# Altium PCB OK6010_DB.PcbDoc (part 3 of 4)
Units mil, origin at the board's own origin, x right, y up, seen from the top; angles counter-clockwise.
Board outline 4000 x 5500 mil, 4 copper layers (Top Layer, Ground Plane, Power Plane, Bottom Layer), stack 34.2 mil thick; 268 components, 248 nets, 1028 pads, 599 vias.
Unrouted connection lines stored in the file: 10.
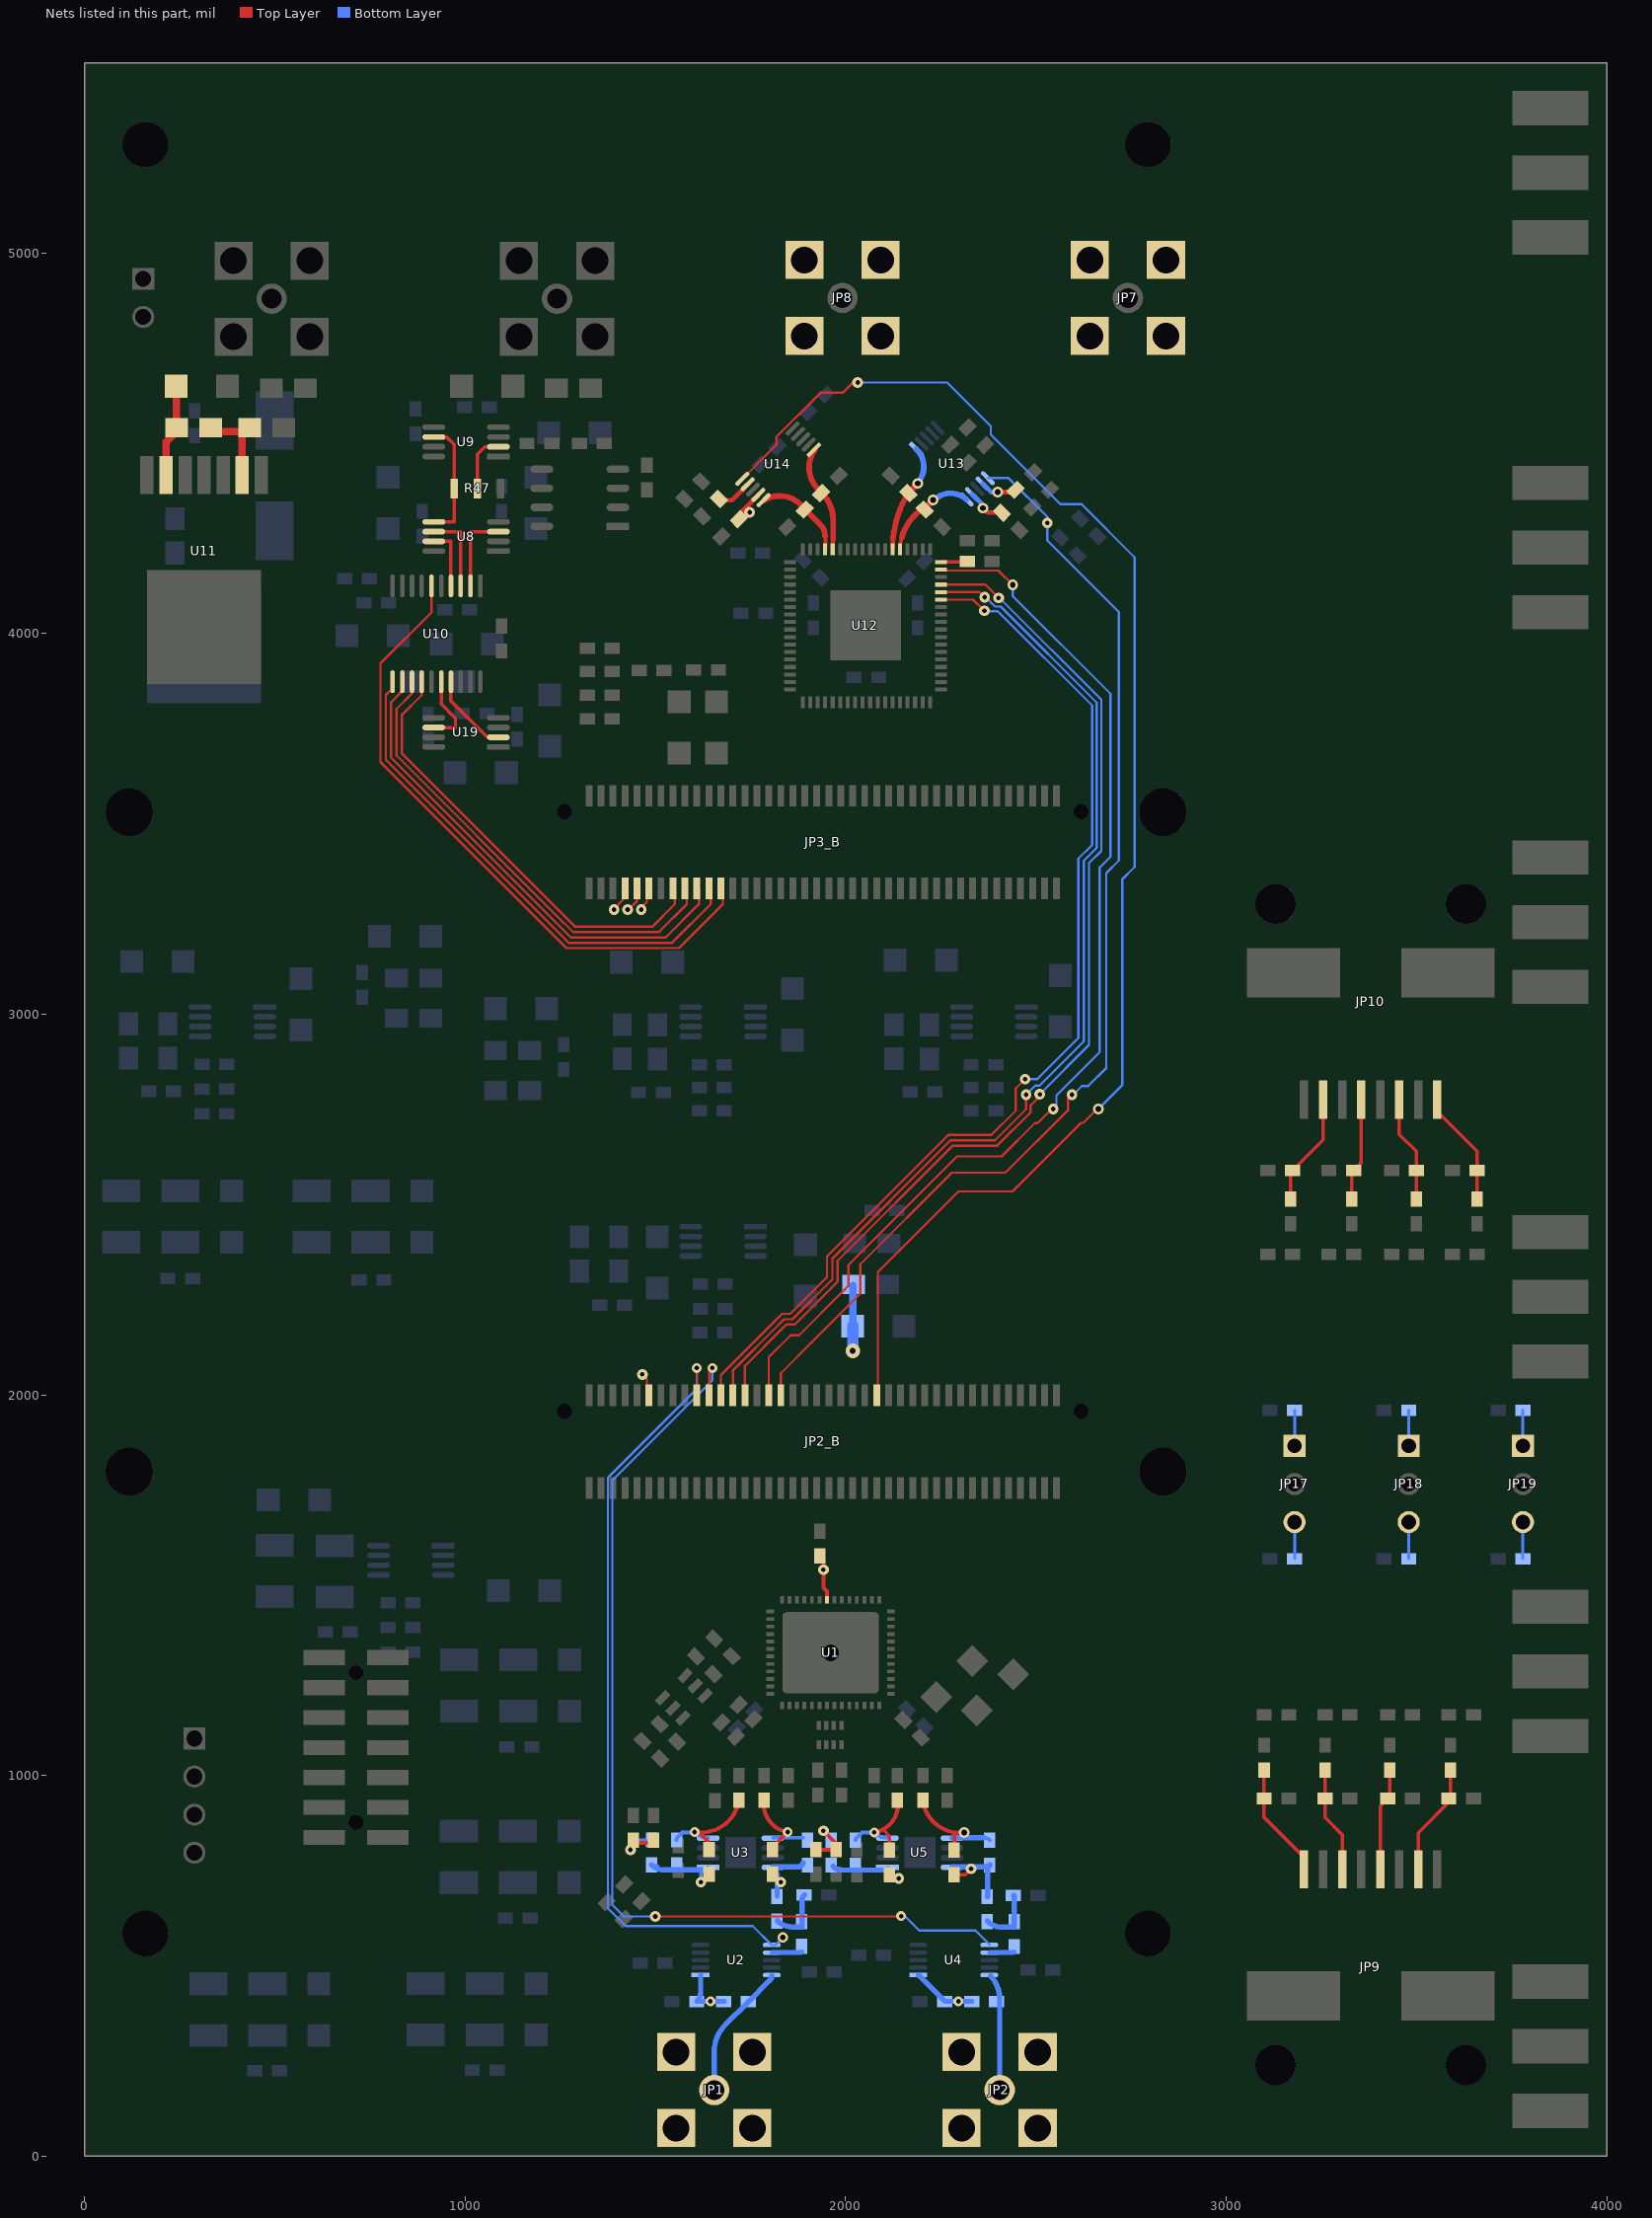
[diagram p5: the nets of this part, all layers, seen from the top]

## Via types
v1: diameter 28, hole 12, Top Layer to Bottom Layer, 291 vias
v2: diameter 28, hole 15, Top Layer to Bottom Layer, 214 vias
v3: diameter 26, hole 12, Top Layer to Bottom Layer, 64 vias
v4: diameter 38, hole 15, Top Layer to Bottom Layer, 26 vias
v5: diameter 35, hole 15, Top Layer to Bottom Layer, 2 vias
v6: diameter 26, hole 12, Top Layer to Bottom Layer, tented both sides, 1 vias
v7: diameter 58, hole 44, Top Layer to Bottom Layer, 1 vias

## Nets (pads, with @x,y where several pads share a name; then routed paths per layer and width w, separated by ;. In a path a pad name is that pad's centre, name@x,y a point inside that pad or via, vN(x,y) a via of type N, cw(c..) or ccw(c..) an arc to the next point about the centre after c; other vN are vias at no path point) (continued)
NetC107_1: C107.1 R1.1 R3.2 U3.8 | length 515.2
  Bottom Layer w14: R3.2@1820.47,683.87 1820.47,732.96 ; U3.8@1809.29,759.96 cw(c1782.29,732.96) 1820.47,732.96 ; U3.8@1809.29,759.96 cw(c1782.29,732.96) 1820.47,732.96 ; U3.8@1809.29,759.96 cw(c1782.29,732.96) 1820.47,732.96 ; U3.8@1809.29,759.96 cw(c1782.29,732.96) 1820.47,732.96 ; U3.8@1809.29,759.96 cw(c1782.29,732.96) 1820.47,732.96 ; U3.8@1809.29,759.96 cw(c1782.29,732.96) 1820.47,732.96 ; U3.8@1809.29,759.96 cw(c1782.29,732.96) 1820.47,732.96 ; U3.8@1809.29,759.96 cw(c1782.29,732.96) 1820.47,732.96 ; U3.8@1809.29,759.96 1872.28,759.96 ; 1872.28,759.96 ccw(c1872.28,777.95) R1.1@1888.58,770.34 ; 1872.28,759.96 ccw(c1872.28,777.95) R1.1@1888.58,770.34 ; 1872.28,759.96 ccw(c1872.28,777.95) R1.1@1888.58,770.34 ; 1872.28,759.96 ccw(c1872.28,777.95) R1.1@1888.58,770.34 ; 1872.28,759.96 ccw(c1872.28,777.95) R1.1@1888.58,770.34 ; 1872.28,759.96 ccw(c1872.28,777.95) R1.1@1888.58,770.34 ; 1872.28,759.96 ccw(c1872.28,777.95) R1.1@1888.58,770.34 ; 1872.28,759.96 ccw(c1872.28,777.95) R1.1@1888.58,770.34
  other v1: 1830,720
NetC107_2: C107.2 R1.2 R4.1 U3.5 | length 257.6
  Top Layer w10: C107.2@1808.49,805.49 1808.49,812.25 v3(1848,851.76)
  Top Layer w10.63: R4.1@1786.2,935.75 ccw(c1859.09,924.65) v3(1848,851.76)
  Bottom Layer w10: U3.5@1809.29,836.76 R1.2@1888.47,836.76
NetC108_1: C108.1 R7.2 R10.1 U3.1 | length 547.8
  Bottom Layer w9: v1(1620,720) 1620,744.18
  Bottom Layer w14: R7.2@1490,766 ccw(c1504.58,780.58) R7.2@1495.74,761.95 ; R7.2@1490,766 ccw(c1504.58,780.58) R7.2@1495.74,761.95 ; R7.2@1490,766 ccw(c1504.58,780.58) R7.2@1495.74,761.95 ; R7.2@1490,766 ccw(c1504.58,780.58) R7.2@1495.74,761.95 ; R7.2@1490,766 ccw(c1504.58,780.58) R7.2@1495.74,761.95 ; R7.2@1490,766 ccw(c1504.58,780.58) R7.2@1495.74,761.95 ; R7.2@1490,766 ccw(c1504.58,780.58) R7.2@1495.74,761.95 ; R7.2@1490,766 ccw(c1504.58,780.58) R7.2@1495.74,761.95 ; R7.2@1495.46,762.23 ccw(c1517.74,784.51) R7.2@1495.74,761.95 ; R7.2@1495.46,762.23 ccw(c1517.74,784.51) R7.2@1495.74,761.95 ; R7.2@1495.46,762.23 ccw(c1517.74,784.51) R7.2@1495.74,761.95 ; R7.2@1495.46,762.23 ccw(c1517.74,784.51) R7.2@1495.74,761.95 ; R7.2@1495.46,762.23 ccw(c1517.74,784.51) R7.2@1495.74,761.95 ; R7.2@1495.46,762.23 ccw(c1517.74,784.51) R7.2@1495.74,761.95 ; R7.2@1495.46,762.23 ccw(c1517.74,784.51) R7.2@1495.74,761.95 ; R7.2@1495.46,762.23 ccw(c1517.74,784.51) R7.2@1495.74,761.95 ; R7.2@1495.74,761.95 ccw(c1504.58,780.58) R7.2@1504.58,759.96 ; R7.2@1495.74,761.95 ccw(c1517.74,784.51) 1517.74,753 ; R7.2@1495.74,761.95 ccw(c1517.74,784.51) 1517.74,753 ; R7.2@1495.74,761.95 ccw(c1504.58,780.58) R7.2@1504.58,759.96 ; R7.2@1495.74,761.95 ccw(c1504.58,780.58) R7.2@1504.58,759.96 ; R7.2@1495.74,761.95 ccw(c1504.58,780.58) R7.2@1504.58,759.96 ; R7.2@1495.74,761.95 ccw(c1517.74,784.51) 1517.74,753 ; R7.2@1495.74,761.95 ccw(c1517.74,784.51) 1517.74,753 ; R7.2@1495.74,761.95 ccw(c1517.74,784.51) 1517.74,753 ; R7.2@1495.74,761.95 ccw(c1517.74,784.51) 1517.74,753 ; R7.2@1495.74,761.95 ccw(c1517.74,784.51) 1517.74,753 ; R7.2@1495.74,761.95 ccw(c1517.74,784.51) 1517.74,753 ; R7.2@1495.74,761.95 ccw(c1504.58,780.58) R7.2@1504.58,759.96 ; R7.2@1495.74,761.95 ccw(c1504.58,780.58) R7.2@1504.58,759.96 ; R7.2@1495.74,761.95 ccw(c1504.58,780.58) R7.2@1504.58,759.96 ; R7.2@1495.74,761.95 ccw(c1504.58,780.58) R7.2@1504.58,759.96 ; 1517.74,753 U3.1@1628.82,753 ; U3.1@1628.82,753 ccw(c1628.82,766.52) U3.1@1638.38,756.96 ; U3.1@1628.82,753 ccw(c1628.82,766.52) U3.1@1638.38,756.96 ; U3.1@1628.82,753 ccw(c1628.82,766.52) U3.1@1638.38,756.96 ; U3.1@1628.82,753 ccw(c1628.82,766.52) U3.1@1638.38,756.96 ; U3.1@1628.82,753 ccw(c1628.82,766.52) U3.1@1638.38,756.96 ; U3.1@1628.82,753 ccw(c1628.82,766.52) U3.1@1638.38,756.96 ; U3.1@1628.82,753 ccw(c1628.82,766.52) U3.1@1638.38,756.96 ; U3.1@1628.82,753 ccw(c1628.82,766.52) U3.1@1638.38,756.96
NetC108_2: C108.2 R8.1 R10.2 U3.4 | length 576.6
  Top Layer w10: v3@1615.03,850.56 1641.49,824.09 C108.2@1641.49,805.49
  Top Layer w10.63: v3(1603.58,851.76) ccw(c1619.91,952.08) 1615.03,850.56 ccw(c1619.91,952.08) R8.1@1720.24,935.75
  Bottom Layer w10: R10.2@1556,831 cw(c1564.57,831) 1558.5,837.05 1572.98,851.53 ; 1572.24,850.76 v3@1604.24,850.76 ; U3.4@1639.38,836.76 U3.4@1638.04,836.76 ; v3@1604.24,850.76 ccw(c1638.04,884.56) U3.4@1638.04,836.76 ; v3@1604.24,850.76 ccw(c1638.04,884.56) U3.4@1638.04,836.76 ; v3@1604.24,850.76 ccw(c1638.04,884.56) U3.4@1638.04,836.76 ; v3@1604.24,850.76 ccw(c1638.04,884.56) U3.4@1638.04,836.76 ; v3@1604.24,850.76 ccw(c1638.04,884.56) U3.4@1638.04,836.76 ; v3@1604.24,850.76 ccw(c1638.04,884.56) U3.4@1638.04,836.76 ; v3@1604.24,850.76 ccw(c1638.04,884.56) U3.4@1638.04,836.76 ; v3@1604.24,850.76 ccw(c1638.04,884.56) U3.4@1638.04,836.76
NetC109_1: C109.1 R11.1 R13.2 U5.8 | length 350.3
  Top Layer w9: C109.1@2285.49,739.9 2314.9,739.9 v1(2330,755)
  Bottom Layer w14: U5.8@2280.38,759.96 R11.1@2365,759.96 ; R13.2@2372.85,682.83 R11.1@2372.85,760.91 ; R11.1@2372.85,762.82 R11.1@2372.85,760.91 ; R11.1@2367.08,759.96 ccw(c2367.08,778.03) R11.1@2372.85,760.91 ; R11.1@2367.08,759.96 ccw(c2367.08,778.03) R11.1@2372.85,760.91 ; R11.1@2367.08,759.96 ccw(c2367.08,778.03) R11.1@2372.85,760.91 ; R11.1@2367.08,759.96 ccw(c2367.08,778.03) R11.1@2372.85,760.91 ; R11.1@2367.08,759.96 ccw(c2367.08,778.03) R11.1@2372.85,760.91 ; R11.1@2367.08,759.96 ccw(c2367.08,778.03) R11.1@2372.85,760.91 ; R11.1@2367.08,759.96 ccw(c2367.08,778.03) R11.1@2372.85,760.91 ; R11.1@2367.08,759.96 ccw(c2367.08,778.03) R11.1@2372.85,760.91 ; R11.1@2372.85,760.91 ccw(c2367.08,778.03) R11.1@2379.84,765.24 ; R11.1@2372.85,760.91 ccw(c2367.08,778.03) R11.1@2379.84,765.24 ; R11.1@2372.85,760.91 ccw(c2367.08,778.03) R11.1@2379.84,765.24 ; R11.1@2372.85,760.91 ccw(c2367.08,778.03) R11.1@2379.84,765.24 ; R11.1@2372.85,760.91 ccw(c2367.08,778.03) R11.1@2379.84,765.24 ; R11.1@2372.85,760.91 ccw(c2367.08,778.03) R11.1@2379.84,765.24 ; R11.1@2372.85,760.91 ccw(c2367.08,778.03) R11.1@2379.84,765.24 ; R11.1@2372.85,760.91 ccw(c2367.08,778.03) R11.1@2379.84,765.24 ; R11.1@2378.85,762.82 cw(c2382.29,762.82) R11.1@2379.84,765.23 ; R11.1@2378.85,762.82 cw(c2382.29,762.82) R11.1@2379.84,765.23 ; R11.1@2378.85,762.82 cw(c2382.29,762.82) R11.1@2379.84,765.23 ; R11.1@2378.85,762.82 cw(c2382.29,762.82) R11.1@2379.84,765.23 ; R11.1@2378.85,762.82 cw(c2382.29,762.82) R11.1@2379.84,765.23 ; R11.1@2378.85,762.82 cw(c2382.29,762.82) R11.1@2379.84,765.23 ; R11.1@2378.85,762.82 cw(c2382.29,762.82) R11.1@2379.84,765.23 ; R11.1@2378.85,762.82 cw(c2382.29,762.82) R11.1@2379.84,765.23
NetC109_2: C109.2 R11.2 R14.1 U5.5 | length 295.4
  Top Layer w10.63: R14.1@2203,935.75 ccw(c2299.75,947.51) 2290.05,850.53 ccw(c2299.75,947.51) v2(2311.52,850.76) ; C109.2@2285.49,804.9 2285.49,845.97
  Bottom Layer w10: R11.2@2364.15,836.76 cw(c2364.15,814.54) R11.2@2379.86,830.25
  Bottom Layer w14: U5.5@2280.38,836.76 R11.2@2364.15,836.76
NetC110_1: C110.1 R17.2 R20.1 U5.1 | length 434.4
  Bottom Layer w9: U5.1@2110.38,755.96 2136.34,730 v1(2140,730)
  Bottom Layer w14: R17.2@1967.46,761.23 ccw(c1989.74,783.51) 1989.74,752 ; R17.2@1967.46,761.23 ccw(c1989.74,783.51) 1989.74,752 ; R17.2@1967.46,761.23 ccw(c1989.74,783.51) 1989.74,752 ; R17.2@1967.46,761.23 ccw(c1989.74,783.51) 1989.74,752 ; R17.2@1967.46,761.23 ccw(c1989.74,783.51) 1989.74,752 ; R17.2@1967.46,761.23 ccw(c1989.74,783.51) 1989.74,752 ; R17.2@1967.46,761.23 ccw(c1989.74,783.51) 1989.74,752 ; R17.2@1967.46,761.23 ccw(c1989.74,783.51) 1989.74,752 ; 1989.74,752 U5.1@2100.82,752 ; U5.1@2100.82,752 ccw(c2100.82,765.52) U5.1@2110.38,755.96 ; U5.1@2100.82,752 ccw(c2100.82,765.52) U5.1@2110.38,755.96 ; U5.1@2100.82,752 ccw(c2100.82,765.52) U5.1@2110.38,755.96 ; U5.1@2100.82,752 ccw(c2100.82,765.52) U5.1@2110.38,755.96 ; U5.1@2100.82,752 ccw(c2100.82,765.52) U5.1@2110.38,755.96 ; U5.1@2100.82,752 ccw(c2100.82,765.52) U5.1@2110.38,755.96 ; U5.1@2100.82,752 ccw(c2100.82,765.52) U5.1@2110.38,755.96 ; U5.1@2100.82,752 ccw(c2100.82,765.52) U5.1@2110.38,755.96
NetC110_2: C110.2 R18.1 R20.2 U5.4 | length 538.2
  Top Layer w9: 2098.2,858.41 2115.49,841.12 C110.2@2115.49,804.9
  Top Layer w10.63: v3(2075.24,850.76) ccw(c2063.58,924.09) 2098.2,858.41 ccw(c2063.58,924.09) R18.1@2136.91,935.75
  Bottom Layer w10: R20.2@2026.26,830.23 cw(c2034.83,830.23) 2028.76,836.28 2043.24,850.76 v3(2075.24,850.76) ; U5.4@2110.38,836.76 U5.4@2109.04,836.76 ; v3(2075.24,850.76) ccw(c2109.04,884.56) U5.4@2109.04,836.76 ; v3(2075.24,850.76) ccw(c2109.04,884.56) U5.4@2109.04,836.76 ; v3(2075.24,850.76) ccw(c2109.04,884.56) U5.4@2109.04,836.76 ; v3(2075.24,850.76) ccw(c2109.04,884.56) U5.4@2109.04,836.76 ; v3(2075.24,850.76) ccw(c2109.04,884.56) U5.4@2109.04,836.76 ; v3(2075.24,850.76) ccw(c2109.04,884.56) U5.4@2109.04,836.76 ; v3(2075.24,850.76) ccw(c2109.04,884.56) U5.4@2109.04,836.76 ; v3(2075.24,850.76) ccw(c2109.04,884.56) U5.4@2109.04,836.76
NetC112_2: C112.2 JP9.2 R62.2 | length 300.4
  Top Layer w9: JP9.2@3505,754 3505,850 3595,940 3590,945 R62.2@3590,1015
NetC114_2: C114.2 JP9.4 R63.2 | length 271.4
  Top Layer w9: JP9.4@3405,754 3405,920 C114.2@3425,940 3430,945 R63.2@3430,1015
NetC116_1: C116.1 JP9.6 R64.2 | length 279.6
  Top Layer w9: R64.2@3260,1015 C116.1@3260,940 3260,890 3305,845 JP9.6@3305,754
NetC118_1: C118.1 JP9.8 R65.2 | length 304.5
  Top Layer w9: R65.2@3100,1015 C118.1@3100,940 3100,890 3205,785 JP9.8@3205,754
NetC120_2: C120.2 JP10.2 R66.2 | length 296.2
  Top Layer w9: R66.2@3170,2515 3170,2585 C120.2@3175,2590 3255,2670 JP10.2@3255,2776
NetC122_2: C122.2 JP10.4 R67.2 | length 271.4
  Top Layer w9: R67.2@3330,2515 3330,2585 C122.2@3335,2590 3355,2610 JP10.4@3355,2776
NetC124_1: C124.1 JP10.6 R68.2 | length 279.6
  Top Layer w9: JP10.6@3455,2776 3455,2685 3500,2640 C124.1@3500,2590 R68.2@3500,2515
NetC126_1: C126.1 JP10.8 R69.2 | length 304.5
  Top Layer w9: JP10.8@3555,2776 3555,2745 3660,2640 C126.1@3660,2590 R69.2@3660,2515
NetJP1_0: JP1.0 R5.1 R9.2 U2.1 | length 330.9
  Bottom Layer w14: U2.1@1619.33,476 1619.33,431.09 ; R5.1@1680.71,406.95 R9.2@1609.33,406.95 ; R9.2@1609.33,406.94 ccw(c1585.18,431.09) 1619.33,431.09 ; R9.2@1609.33,406.95 ccw(c1585.18,431.09) 1619.33,431.09 ; R9.2@1609.33,406.95 ccw(c1585.18,431.09) 1619.33,431.09 ; R9.2@1609.33,406.95 ccw(c1585.18,431.09) 1619.33,431.09 ; R9.2@1609.33,406.95 ccw(c1585.18,431.09) 1619.33,431.09 ; R9.2@1609.33,406.95 ccw(c1585.18,431.09) 1619.33,431.09 ; R9.2@1609.33,406.95 ccw(c1585.18,431.09) 1619.33,431.09 ; R9.2@1609.33,406.95 ccw(c1585.18,431.09) 1619.33,431.09
  other v3: 1645.02,406.95
NetJP1_1: JP1.1 R5.2 U2.10 | length 350.9
  Bottom Layer w14: JP1.1@1655,181 1655,274.82 cw(c1755,274.82) 1684.29,345.53 1744.88,406.12 1800.16,461.4 ccw(c1785.24,476.32) U2.10@1806.26,474.48
NetJP2_0: JP2.0 R15.1 R19.2 U4.1 | length 169
  Bottom Layer w14: U4.1@2191.93,476.28 2261.26,406.95 R15.1@2332.2,406.95
  other v3: 2296.73,406.95
NetJP2_1: JP2.1 R15.2 U4.10 | length 299.2
  Bottom Layer w14: U4.10@2381.09,474.08 cw(c2316.01,413.39) 2405,413.39 JP2.1@2405,181
NetJP7_0: JP7.0 R35.2 U13.9 | length 103.7
  Top Layer w12: v2@2359,4332 2373.04,4317.96 R35.2@2411.04,4317.96
  Bottom Layer w12: U13.9@2332.15,4366.69 2359,4339.84 v2@2359,4332
  other v2: 2361,4330
NetJP8_0: JP8.0 R39.2 U14.9 | length 88.3
  Top Layer w12: R39.2@1719.96,4313.8 1735,4328.84 ; v1(1748,4319) 1735,4328.84 ; U14.9@1770.85,4364.69 1735,4328.84
NetJP17_1: JP17.1 R58.1 | length 94
  Bottom Layer w8: JP17.1@3180,1866 R58.1@3180,1960
NetJP17_3: JP17.3 R59.1 | length 96
  Bottom Layer w8: R59.1@3180,1570 JP17.3@3180,1666
NetJP18_1: JP18.1 R60.1 | length 94
  Bottom Layer w8: JP18.1@3480,1866 R60.1@3480,1960
NetJP18_3: JP18.3 R61.1 | length 96
  Bottom Layer w8: R61.1@3480,1570 JP18.3@3480,1666
NetJP19_1: JP19.1 R70.1 | length 94
  Bottom Layer w8: JP19.1@3780,1866 R70.1@3780,1960
NetJP19_3: JP19.3 R71.1 | length 96
  Bottom Layer w8: R71.1@3780,1570 JP19.3@3780,1666
NetR2_1: R2.1 U2.7 | length 121.7
  Bottom Layer w12: U2.7@1806.34,535.37 R2.1@1880.52,535.37 ; R2.1@1880.52,535.37 ccw(c1880.52,542.93) R2.1@1885.87,537.58 ; R2.1@1880.52,535.37 ccw(c1880.52,542.93) R2.1@1885.87,537.58 ; R2.1@1880.52,535.37 ccw(c1880.52,542.93) R2.1@1885.87,537.58 ; R2.1@1880.52,535.37 ccw(c1880.52,542.93) R2.1@1885.87,537.58 ; R2.1@1880.52,535.37 ccw(c1880.52,542.93) R2.1@1885.87,537.58 ; R2.1@1880.52,535.37 ccw(c1880.52,542.93) R2.1@1885.87,537.58 ; R2.1@1880.52,535.37 ccw(c1880.52,542.93) R2.1@1885.87,537.58 ; R2.1@1880.52,535.37 ccw(c1880.52,542.93) R2.1@1885.87,537.58
NetR2_2: R2.2 R3.1 R6.2 | length 154.9
  Bottom Layer w14: R3.1@1820.47,618.87 ccw(c1859.8,658.2) 1859.8,602.58 1885.87,602.58 1885.87,671.72 cw(c1906.24,671.72) R6.2@1891.83,686.13
NetR7_1: R7.1 R54.2 R55.2 | length 99.7
  Top Layer w10: R54.2@1449.8,823.61 1489,823.61 R55.2@1495.9,830.51
  Bottom Layer w9: v1(1435,805) 1461,831 R7.1@1475,831
NetR12_1: R12.1 U4.7 | length 94.7
  Bottom Layer w12: U4.7@2378.93,535.37 R12.1@2439.48,535.37 ; R12.1@2439.48,535.37 ccw(c2439.48,540.8) R12.1@2443.32,536.96 ; R12.1@2439.48,535.37 ccw(c2439.48,540.8) R12.1@2443.32,536.96 ; R12.1@2439.48,535.37 ccw(c2439.48,540.8) R12.1@2443.32,536.96 ; R12.1@2439.48,535.37 ccw(c2439.48,540.8) R12.1@2443.32,536.96 ; R12.1@2439.48,535.37 ccw(c2439.48,540.8) R12.1@2443.32,536.96 ; R12.1@2439.48,535.37 ccw(c2439.48,540.8) R12.1@2443.32,536.96 ; R12.1@2439.48,535.37 ccw(c2439.48,540.8) R12.1@2443.32,536.96 ; R12.1@2439.48,535.37 ccw(c2439.48,540.8) R12.1@2443.32,536.96
NetR12_2: R12.2 R13.1 R16.2 | length 484.9
  Bottom Layer w14: R13.1@2372.85,617.83 ccw(c2411.17,656.15) 2411.17,601.96 ; R13.1@2372.85,617.83 ccw(c2411.17,656.15) 2411.17,601.96 ; R13.1@2372.85,617.83 ccw(c2411.17,656.15) 2411.17,601.96 ; R13.1@2372.85,617.83 ccw(c2411.17,656.15) 2411.17,601.96 ; R13.1@2372.85,617.83 ccw(c2411.17,656.15) 2411.17,601.96 ; R13.1@2372.85,617.83 ccw(c2411.17,656.15) 2411.17,601.96 ; R13.1@2372.85,617.83 ccw(c2411.17,656.15) 2411.17,601.96 ; R13.1@2372.85,617.83 ccw(c2411.17,656.15) 2411.17,601.96 ; 2411.17,601.96 2443.32,601.96 R16.2@2443.32,682.21 ; R16.2@2441.83,685.8 cw(c2438.24,682.21) R16.2@2443.32,682.21 ; R16.2@2441.83,685.8 cw(c2438.24,682.21) R16.2@2443.32,682.21 ; R16.2@2441.83,685.8 cw(c2438.24,682.21) R16.2@2443.32,682.21 ; R16.2@2441.83,685.8 cw(c2438.24,682.21) R16.2@2443.32,682.21 ; R16.2@2441.83,685.8 cw(c2438.24,682.21) R16.2@2443.32,682.21 ; R16.2@2441.83,685.8 cw(c2438.24,682.21) R16.2@2443.32,682.21 ; R16.2@2441.83,685.8 cw(c2438.24,682.21) R16.2@2443.32,682.21 ; R16.2@2441.83,685.8 cw(c2438.24,682.21) R16.2@2443.32,682.21
NetR17_1: R17.1 R56.2 R57.2 | length 116.2
  Top Layer w10: R56.2@1922.1,805.49 R57.2@1975.1,805.49 1975.1,821.9 v1(1942,855)
NetR24_1: R24.1 R25.2 U11.2 | length 196.4
  Top Layer w20: R24.1@332,4531 414.51,4531 U11.2@414.51,4417.1
NetR24_2: R24.2 R26.1 U11.6 | length 234.3
  Top Layer w20: U11.6@214.51,4417.1 214.51,4503.51 242,4531 R26.1@242,4640
NetR31_2: R31.2 U12.54 | length 65.8
  Top Layer w9: U12.54@2251.06,4188.87 R31.2@2316.83,4188.87
NetR32_1: R32.1 U12.59 U13.10 | length 460.8
  Top Layer w8: R32.1@2208.66,4329.66 v2(2230,4351)
  Top Layer w9: R32.1@2200.32,4326.32 cw(c2274,4218) R32.1@2203.98,4328.72 ; R32.1@2200.32,4326.32 cw(c2274,4218) R32.1@2203.98,4328.72 ; R32.1@2200.32,4326.32 cw(c2274,4218) R32.1@2203.98,4328.72 ; R32.1@2200.32,4326.32 cw(c2274,4218) R32.1@2203.98,4328.72 ; R32.1@2200.32,4326.32 cw(c2274,4218) R32.1@2203.98,4328.72 ; R32.1@2200.32,4326.32 cw(c2274,4218) R32.1@2203.98,4328.72 ; R32.1@2200.32,4326.32 cw(c2274,4218) R32.1@2203.98,4328.72 ; R32.1@2203.98,4328.72 cw(c2274,4218) R32.1@2208.5,4331.45 ; R32.1@2203.98,4328.72 cw(c2274,4218) R32.1@2208.5,4331.45 ; R32.1@2203.98,4328.72 cw(c2274,4218) R32.1@2208.5,4331.45 ; R32.1@2203.98,4328.72 cw(c2274,4218) R32.1@2208.5,4331.45 ; R32.1@2203.98,4328.72 cw(c2274,4218) R32.1@2208.5,4331.45 ; R32.1@2203.98,4328.72 cw(c2274,4218) R32.1@2208.5,4331.45 ; R32.1@2203.98,4328.72 cw(c2274,4218) R32.1@2208.5,4331.45
  Top Layer w10: U12.59@2143.08,4222.44 cw(c2274,4218) 2147.46,4251.91
  Top Layer w11: R32.1@2200.13,4326.13 cw(c2208.66,4317.59) R32.1@2200.32,4326.32 ; R32.1@2200.13,4326.13 cw(c2208.66,4317.59) R32.1@2200.32,4326.32 ; R32.1@2200.13,4326.13 cw(c2208.66,4317.59) R32.1@2200.32,4326.32 ; R32.1@2200.13,4326.13 cw(c2208.66,4317.59) R32.1@2200.32,4326.32 ; R32.1@2200.13,4326.13 cw(c2208.66,4317.59) R32.1@2208.66,4329.66 ; R32.1@2200.13,4326.13 cw(c2208.66,4317.59) R32.1@2200.32,4326.32 ; R32.1@2200.13,4326.13 cw(c2208.66,4317.59) R32.1@2200.32,4326.32 ; R32.1@2200.13,4326.13 cw(c2208.66,4317.59) R32.1@2200.32,4326.32 ; R32.1@2200.32,4326.32 cw(c2208.66,4317.59) R32.1@2203.98,4328.72 ; R32.1@2200.32,4326.32 cw(c2208.66,4317.59) R32.1@2203.98,4328.72 ; R32.1@2200.32,4326.32 cw(c2208.66,4317.59) R32.1@2203.98,4328.72 ; R32.1@2200.32,4326.32 cw(c2208.66,4317.59) R32.1@2203.98,4328.72 ; R32.1@2200.32,4326.32 cw(c2208.66,4317.59) R32.1@2203.98,4328.72 ; R32.1@2200.32,4326.32 cw(c2208.66,4317.59) R32.1@2203.98,4328.72 ; R32.1@2200.32,4326.32 cw(c2208.66,4317.59) R32.1@2203.98,4328.72 ; R32.1@2203.98,4328.72 cw(c2208.66,4317.59) R32.1@2204.51,4328.93 ; R32.1@2203.98,4328.72 cw(c2208.66,4317.59) R32.1@2204.51,4328.93 ; R32.1@2203.98,4328.72 cw(c2208.66,4317.59) R32.1@2204.51,4328.93 ; R32.1@2203.98,4328.72 cw(c2208.66,4317.59) R32.1@2204.51,4328.93 ; R32.1@2203.98,4328.72 cw(c2208.66,4317.59) R32.1@2204.51,4328.93 ; R32.1@2203.98,4328.72 cw(c2208.66,4317.59) R32.1@2204.51,4328.93 ; R32.1@2203.98,4328.72 cw(c2208.66,4317.59) R32.1@2204.51,4328.93 ; R32.1@2204.51,4328.93 cw(c2208.66,4317.59) R32.1@2208.66,4329.66 ; R32.1@2204.51,4328.93 cw(c2208.66,4317.59) R32.1@2208.66,4329.66 ; R32.1@2204.51,4328.93 cw(c2208.66,4317.59) R32.1@2208.66,4329.66 ; R32.1@2204.51,4328.93 cw(c2208.66,4317.59) R32.1@2208.66,4329.66 ; R32.1@2204.51,4328.93 cw(c2208.66,4317.59) R32.1@2208.66,4329.66 ; R32.1@2204.51,4328.93 cw(c2208.66,4317.59) R32.1@2208.66,4329.66 ; R32.1@2204.51,4328.93 cw(c2208.66,4317.59) R32.1@2208.66,4329.66
  Top Layer w15: 2147.58,4252.07 cw(c2273.43,4218.35) R32.1@2204.51,4328.93 ; R32.1@2208.66,4319.66 R32.1@2208.66,4326.67 ; R32.1@2204.51,4328.93 cw(c2273.43,4218.35) R32.1@2208.28,4331.19 ; R32.1@2204.51,4328.93 cw(c2273.43,4218.35) R32.1@2208.28,4331.19 ; R32.1@2204.51,4328.93 cw(c2273.43,4218.35) R32.1@2208.28,4331.19 ; R32.1@2204.51,4328.93 cw(c2273.43,4218.35) R32.1@2208.28,4331.19 ; R32.1@2204.51,4328.93 cw(c2273.43,4218.35) R32.1@2208.28,4331.19 ; R32.1@2204.51,4328.93 cw(c2273.43,4218.35) R32.1@2208.28,4331.19 ; R32.1@2204.51,4328.93 cw(c2273.43,4218.35) R32.1@2208.28,4331.19
  Top Layer w16: R32.1@2208.66,4326.67 R32.1@2208.66,4329.66 ; v2@2224,4351 cw(c2209.51,4351) 2219.76,4340.76 cw(c2230,4330.51) v2@2230,4345
  Bottom Layer w15: v2@2231.48,4349.61 cw(c2275.92,4307.82) U13.10@2317.71,4352.26
NetR33_1: R33.1 U13.7 | length 98.8
  Top Layer w9: R33.1@2441,4372 R33.1@2447,4378
  Top Layer w12: v2(2400,4372) R33.1@2441,4372
  Bottom Layer w12: U13.7@2359.99,4394.53 2382.52,4372 v2(2400,4372)
NetR34_2: R34.2 U12.60 U13.1 | length 316.5
  Top Layer w10.63: U12.60@2124.09,4222.42 cw(c2402,4223) 2125.62,4252.05
  Top Layer w15: 2124.58,4247.57 cw(c2401.43,4223.35) R34.2@2165.35,4369.97
  Top Layer w16: R34.2@2165.35,4369.98 v2(2190,4394.62) ; v2@2184,4394.62 cw(c2169.51,4394.62) 2179.76,4384.38 cw(c2190,4374.14) v2@2190,4388.62
  Bottom Layer w15: U13.1@2185.75,4484.78 cw(c2142.76,4438.73) v2@2188.8,4395.74
NetR36_1: R36.1 U12.69 U14.10 | length 248.7
  Top Layer w10.63: U12.69@1946.93,4222.42 1946.93,4256
  Top Layer w15: U14.10@1786.22,4350.27 cw(c1827.05,4284.99) R36.1@1892.34,4325.82 ; R36.1@1898.19,4324.81 ccw(c1893.7,4320.32) 1893.7,4326.67 1927.3,4293.07 1933.79,4286.58 cw(c1904.54,4257.32) 1945.91,4257.32
NetR37_1: R37.1 U14.7 | length 90.2
  Top Layer w12: R37.1@1670,4351 1701.48,4351 U14.7@1743.01,4392.53
NetR38_2: R38.2 U12.68 U14.1 | length 857.2
  Top Layer w10.63: U12.68@1966.61,4222.42 1966.61,4245.59 ; 1966.61,4240.31 cw(c1975.3,4240.31) 1969.16,4246.45 ; 1966.61,4245.59 cw(c1970.03,4245.59) 1967.61,4248 ; 1966.61,4245.59 cw(c1970.03,4245.59) 1967.61,4248 ; 1966.61,4245.59 cw(c1970.03,4245.59) 1967.61,4248 ; 1966.61,4245.59 cw(c1970.03,4245.59) 1967.61,4248 ; 1966.61,4245.59 cw(c1970.03,4245.59) 1967.61,4248 ; 1966.61,4245.59 cw(c1970.03,4245.59) 1967.61,4248 ; 1966.61,4245.59 cw(c1970.03,4245.59) 1967.61,4248 ; 1966.61,4245.59 cw(c1970.03,4245.59) 1967.61,4248
  Top Layer w15: U14.1@1918.99,4482.89 ccw(c1984.25,4436.63) R38.2@1937.99,4371.36 ; R38.2@1937.01,4369.98 R38.2@1938.33,4368.66 ; 1967.61,4248 1967.61,4297.95 ; R38.2@1938.33,4368.66 cw(c1867.61,4297.95) 1967.61,4297.95 ; R38.2@1938.33,4368.66 cw(c1867.61,4297.95) 1967.61,4297.95 ; R38.2@1938.33,4368.66 cw(c1867.61,4297.95) 1967.61,4297.95 ; R38.2@1938.33,4368.66 cw(c1867.61,4297.95) 1967.61,4297.95 ; R38.2@1938.33,4368.66 cw(c1867.61,4297.95) 1967.61,4297.95 ; R38.2@1938.33,4368.66 cw(c1867.61,4297.95) 1967.61,4297.95 ; R38.2@1938.33,4368.66 cw(c1867.61,4297.95) 1967.61,4297.95 ; R38.2@1938.33,4368.66 cw(c1867.61,4297.95) 1967.61,4297.95
NetR47_2: R47.2 U9.2 | length 168.2
  Top Layer w9: R47.2@1032.58,4366.68 1032.58,4471.1 1052.58,4491.1 U9.2@1088.05,4491.1
NetR47_3: R47.3 U8.5 U9.6 | length 318.3
  Top Layer w9: U8.5@918.05,4293.74 971.58,4293.74 971.58,4366.68 971.58,4496.7 951.58,4516.7 U9.6@918.05,4516.7
NetU8_3: U8.3 U10.2 | length 216.1
  Top Layer w9: U10.2@1014.39,4125.69 1014.39,4268.14 U8.3@1088.05,4268.14
NetU8_6: U8.6 U10.3 | length 213.2
  Top Layer w9: U8.6@918.05,4268.14 988.8,4268.14 U10.3@988.8,4125.69
NetU8_7: U8.7 U10.4 | length 162
  Top Layer w9: U8.7@918.05,4242.54 963.2,4242.54 U10.4@963.2,4125.69
NetU10_16: U10.16 U19.6 | length 192.7
  Top Layer w9: U19.6@918.05,3753.49 975,3753.49 975,3778 937.61,3815.39 U10.16@937.61,3873.72
NetU10_17: U10.17 U19.2 | length 215.1
  Top Layer w9: U10.17@963.2,3873.72 963.2,3822.8 1058.11,3727.89 U19.2@1088.05,3727.89
OVDD18: C50.2 C84.1 L22.2 U1.34 | length 297.6
  Top Layer w10: C50.2@1933,1577 1942,1568 v1(1942,1541) 1942,1493.96 1951.11,1484.85 U1.34@1951.11,1461.72
  Bottom Layer w12: L22.2@2019,2288 L22.2@2021,2290
  Bottom Layer w20: C84.1@2019,2181 L22.2@2019,2288
  Bottom Layer w30: v4(2019,2116) C84.1@2019,2181
R\E\S\E\T\: JP3_B.24 U10.6 | length 1709.7
  Top Layer w6: U10.6@912.02,4125.69 912.02,4056.02 778,3922 778,3662.8 1266.8,3174 1562,3174 1677.5,3289.5 JP3_B.24@1677.5,3331
RESET: JP2_B.31 U12.53 | length 2900.7
  Top Layer w6: JP2_B.31@1798.5,1999 1798.5,2099.5 1856,2157 1878,2157 1991,2270 1995.1,2274.1 1999.2,2278.2 2003.3,2282.3 2007.4,2286.4 2007.4,2341.21 2293.2,2627 2410.4,2627 2497.7,2714.3 2505.03,2714.3 2542.03,2751.3 v1(2546,2751.3) ; U12.53@2250.73,4168.31 2253.04,4166 2401.54,4166 v2(2439.44,4128.09)
  Bottom Layer w6: v2(2439.44,4128.09) 2439.44,4098.75 2696,3842.2 2696,3414 2668,3386 2668,2901 2554,2787 2554,2759.3 v1(2546,2751.3)
S\Y\N\C\: JP3_B.16 U10.14 | length 1182
  Top Layer w6: U10.14@886.43,3873.72 886.43,3838.43 834,3786 834,3686 1290,3230 1492,3230 1551.5,3289.5 JP3_B.16@1551.5,3331
SCLK: JP3_B.18 U10.13 | length 1237.7
  Top Layer w6: U10.13@860.84,3873.72 860.84,3842.84 820,3802 820,3680.2 1239.1,3261.1 1284.2,3216 1509.5,3216 1583,3289.5 JP3_B.18@1583,3331
SCLK2: JP2_B.27 U12.51 | length 2843.6
  Top Layer w6: JP2_B.27@1735.5,1999 1735.5,2076.1 1836.2,2176.8 1840.3,2180.9 1844.4,2185 1866.4,2185 1971.2,2289.8 1975.3,2293.9 1979.4,2298 1979.4,2352.8 2281.6,2655 2398.8,2655 2486.5,2742.7 2486.5,2760.82 2510.5,2784.82 v1(2510.5,2790) ; U12.51@2250.73,4128.94 2367.43,4128.94 v1(2402.25,4094.13)
  Bottom Layer w6: v1(2402.25,4094.13) 2404.47,4094.13 2672,3826.6 2672,3429.6 2640,3397.6 2640,2919.5 v1(2510.5,2790)
SDIN: JP3_B.20 U10.12 | length 1293.4
  Top Layer w6: U10.12@835.25,3873.72 835.25,3849.25 806,3820 806,3674.4 1278.4,3202 1527,3202 1614.5,3289.5 JP3_B.20@1614.5,3331
SDIO: JP2_B.25 U12.50 | length 2833.6
  Top Layer w6: JP2_B.25@1704,1999 1704,2064.4 1826.3,2186.7 1830.4,2190.8 1834.5,2194.9 1838.6,2199 1860.6,2199 1961.3,2299.7 1965.4,2303.8 1965.4,2358.6 2275.8,2669 2393,2669 2474.5,2750.5 v1(2474.5,2789) ; U12.50@2250.73,4109.26 2351.98,4109.26 v1(2365.5,4095.74)
  Bottom Layer w6: v1(2365.5,4095.74) 2368.11,4095.74 2392.72,4071.13 2407.67,4071.13 2660,3818.8 2660,3437.4 2626,3403.4 2626,2929 2510,2813 2498.5,2813 v1(2474.5,2789)
SDO: JP3_B.22 U10.11 | length 1366.4
  Top Layer w6: U10.11@809.66,3873.72 809.66,3856.66 792,3839 792,3668.6 1219.3,3241.3 ; 1231.6,3229 1219.3,3241.3 ; JP3_B.22@1646,3331 1646,3289.5 1544.5,3188 1272.6,3188 1219.3,3241.3
SDO2: JP2_B.23 U12.49 | length 2826.6
  Top Layer w6: JP2_B.23@1672.5,1999 1672.5,2052.7 1816.4,2196.6 1820.5,2200.7 1824.6,2204.8 1828.7,2208.9 1832.8,2213 1854.8,2213 1951.4,2309.6 1951.4,2364.4 2270,2683 2383,2683 2447,2747 2447,2805 v1(2472,2830) ; U12.49@2250.73,4089.58 2335.42,4089.58 v1(2365,4060)
  Bottom Layer w6: v1(2365,4060) 2365.87,4059.13 2399.87,4059.13 2648,3811 2648,3445.2 2612,3409.2 2612,2938 2504,2830 v1(2472,2830)
SYS_CLK4: JP2_B.11 | length 62.2
  Top Layer w6: v1(1466,2054) 1478,2042 1478,2004.5 JP2_B.11@1483.5,1999
SYS_CLK5: JP3_B.8 | length 67
  Top Layer w6: v1@1389,3275 1415.5,3301.5 JP3_B.8@1415.5,3331
  other v1: 1392,3275
USB_SCL: JP3_B.10 | length 65.3
  Top Layer w6: v1@1429.5,3275 1452,3297.5 JP3_B.10@1452,3331
  other v1: 1427.5,3275
USB_SDA: JP3_B.12 | length 63.7
  Top Layer w6: v1(1463,3275) v1@1463,3282 ; v1@1465,3282 1478,3295 1478,3325.5 JP3_B.12@1483.5,3331
WR1_IN: JP2_B.19 U2.6 | length 2097.2
  Top Layer w6: v3@1605.22,2067.22 v3(1609,2071) ; JP2_B.19@1610.22,1999.31 v3@1610.22,2067.22
  Bottom Layer w6: v3(1609,2071) 1609,2016 1375.5,1782.5 1375.5,651.5 1422,605 1756.06,605 U2.6@1806,555.06 1815.06,555.06 v2(1835,575)
WR1_OUT: JP2_B.49 U14.6 | length 3922.5
  Top Layer w6: U14.6@1728.87,4406.67 1797.2,4475 1818,4495.8 1818,4517 1818.12,4517 1934.12,4633 1993,4633 2020,4660 v1(2032,4660) ; JP2_B.49@2082,1999 2085,2002 2085,2323 2297,2535 2438.88,2535 2618.94,2715.06 2624.96,2715.06 2661.2,2751.3 v2(2664.7,2751.3)
  Bottom Layer w6: v1(2032,4660) 2267,4660 2382,4545 2382,4522.88 2564.88,4340 2620,4340 2760,4200 2760,3387 2727,3354 2727,2813.6 v2(2664.7,2751.3)
WR2_IN: JP2_B.21 U4.6 | length 2638.4
  Top Layer w6: v1(1500,630) 2135,630 v3@2146,641 ; JP2_B.21@1641.72,1999.31 1641.72,2062.78 v3(1649.95,2071)
  Bottom Layer w6: v1(1500,630) 1418,630 1387.5,660.5 1387.5,1775.5 1394,1782 1649.95,2037.95 v3(1649.95,2071) ; v3@2146,641 2194,593 2341.3,593 U4.6@2378.93,555.37
  other v3: 2146,631
WR2_OUT: JP2_B.33 U13.6 | length 3045.9
  Top Layer w6: JP2_B.33@1830,1999 1830,2057 1912,2139 1912,2139.27 2039,2266.27 2039,2343.8 2279.2,2584 2420,2584 2585,2749 2585,2779 v1(2595,2789)
  Bottom Layer w6: U13.6@2374.13,4408.67 2428.33,4408.67 2530,4307 2530,4245 2718,4057 2718,3404.4 2685,3371.4 2685,2859 2637.5,2811.5 2621.21,2811.5 2598.71,2789 v1(2595,2789)
  other v1: 2530,4291
pads on no net: JP2_B.3 JP2_B.12 JP2_B.35 JP2_B.55 JP2_B.161 JP2_B.162 JP3_B.7 JP3_B.30 JP3_B.161 JP3_B.162 JP9.0 JP10.0 JP20. JP20.12 JP20.14 U3.7 U5.7 U6.1 U6.5 U6.6 U7.1 U7.3 U7.5 U7.7 U7.8 U9.1 U9.5 U9.8 U11.3 U11.7 U12.62 U12.63 U12.65 U12.66 U19.1 U19.5 U19.8

## Polygon pours and split planes (outlines as drawn)
no net on Top Layer "Top Layer-No Net" (solid, pour order 2): 1913,969 1913,881 2005,881 2006,882 2005,883 2005,969
NetJP8_0 on Ground Plane (split plane): 2189.92,4690.08 1970,4690.08 1968.44,4689.77 1967.78,4689.33 1967.12,4688.88 1785.37,4507.14 1738.43,4460.2 1735.79,4458.79 1733.28,4456.72 1731.21,4454.21 1729.8,4451.57 1727.12,4448.88 1726.23,4447.56 1725.92,4446 1725.92,4377.36 1725.88,4377.32 1725.92,4377.27 1725.92,4373.51 1726.23,4371.95 1727.12,4370.62 1782.49,4315.25 1762.31,4295.08 1733.69,4295.08 1700.88,4327.88 1586.77,4442 1800.88,4656.12 1801.77,4657.44 1802.08,4659 1802.08,4667 1802.08,5479.9 2189.92,5479.9
NetJP7_0 on Ground Plane (split plane): 2935.92,4683.69 2550.72,4298.49 2547.12,4294.88 2538.31,4286.08 2367.69,4286.08 2324.89,4328.88 2364.12,4368.11 2374.62,4357.62 2374.71,4357.55 2375.05,4357.33 2376.9,4355.7 2380.85,4353.06 2385.11,4350.96 2389.6,4349.44 2394.26,4348.51 2399,4348.2 2403.74,4348.51 2408.39,4349.44 2412.89,4350.96 2417.15,4353.06 2421.1,4355.7 2424.67,4358.83 2425.67,4359.97 2425.88,4360.12 2550.88,4485.12 2551.77,4486.44 2552.08,4488 2552.08,4667 2552.08,5479.9 2935.92,5479.9
no net on Ground Plane (split plane): 1761.78,4413.22 1761.58,4413.02 1761.58,4413.42
NetJP2_0 on Ground Plane (split plane): 2617.92,20.1 2192.08,20.1 2192.08,429.92 2617.92,429.92
AGND on Ground Plane (split plane): 1780.92,2484.08 1715,2484.08 1713.44,2483.77 1712.12,2482.88 1711.23,2481.56 1710.92,2480 1710.92,2414.08 1584.08,2414.08 1584.08,2480 1583.77,2481.56 1582.88,2482.88 1581.56,2483.77 1580,2484.08 1504.08,2484.08 1504.08,2555.92 1780.92,2555.92
AGND on Ground Plane (split plane): 1475.96,1793.18 1461.04,1793.18 1475.96,1793.18
AGND on Ground Plane (split plane): 1010.92,1639.08 900,1639.08 898.44,1638.77 897.12,1637.88 896.23,1636.56 895.92,1635 895.92,1574.08 679.08,1574.08 679.08,1820.92 1010.92,1820.92
AGND on Ground Plane (split plane): 153 vertices, not listed, extent 20.1,20.1 3979.9,5479.9
NetJP1_0 on Ground Plane (split plane): 1867.92,20.1 1442.08,20.1 1442.08,329 1442.08,357.92 1524.86,357.92 1524.86,357.91 1528.55,358.27 1532.1,359.35 1535.37,361.1 1538.24,363.45 1538.23,363.46 1538.26,363.5 1540.61,366.25 1542.52,369.38 1543.93,372.77 1544.78,376.34 1545.07,379.95 1545.08,380 1545.08,415.31 1559.69,429.92 1867.92,429.92
DVDD33 on Power Plane (split plane): 2718.92,3029.08 1904.08,3029.08 1904.08,3608.31 1992.88,3697.12 1993.77,3698.44 1994.08,3700 1994.08,3861.08 1994.08,3863 1994.08,3876 1994.08,3888.92 2100.92,3888.92 2100.92,3876 2100.92,3863 2100.92,3858.92 2100.61,3857.36 2100.92,3586.69 1997.12,3482.88 1996.23,3481.56 1995.92,3480 1995.92,3152.8 1996.23,3151.24 1997.12,3149.92 1998.44,3149.03 2000,3148.72 2595,3148.72 2596.56,3149.03 2597.88,3149.92 2598.77,3151.24 2599.08,3152.8 2599.08,3607.8 2599.08,3954 2599.08,4216 2599.08,4272.92 2718.92,4272.92
AVDD33 on Power Plane (split plane): 2590.92,3952.31 2590.92,3607.8 2590.92,3156.88 2499.08,3156.88 2499.08,3737.8 2499.08,3773 2499.08,3844 2498.77,3845.56 2497.88,3846.88 2285.88,4058.88 2278.49,4066.28 2273.88,4070.88 2141.88,4202.88 2140.56,4203.77 2139,4204.08 1873.69,4204.08 1838.77,4239 1911.69,4311.92 2231.31,4311.92
no net on Power Plane (split plane): 2490.92,3842.31 2490.92,3773 2490.92,3737.8 2490.92,3156.88 2004.08,3156.88 2004.08,3478.31 2107.88,3582.12 2107.89,3582.12 2108.36,3582.83 2108.77,3583.44 2108.93,3584.27 2109.08,3585 2108.85,3782.87 2109.08,3784 2109.08,3857.92 2283,3857.92 2284.56,3858.23 2285.88,3859.12 2286.77,3860.44 2287.08,3862 2287.08,3893 2287.08,4046.15
CVDD18 on Power Plane (split plane): 1867.92,4198.31 1867.92,4178.82 1867.62,4177.28 1867.92,4077.68 1821.22,4030.99 1029.12,3238.88 971.5,3181.27 847.88,3304.88 822.77,3330 847.88,3355.12 1202.88,3710.12 1203.77,3711.44 1204.08,3713 1204.08,4026.92 1531,4026.92 1531.76,4027.07 1532.56,4027.23 1533.19,4027.65 1533.88,4028.12 1533.89,4028.12 1718.21,4212.67 1718.88,4213.12 1740.69,4234.92 1831.31,4234.92
DVDD18 on Power Plane (split plane): 2268.12,4065.12 2272.72,4060.51 2278.92,4054.31 2278.92,3893 2278.92,3866.08 2109.08,3866.08 2109.08,3876 2109.08,3893 2108.77,3894.56 2107.88,3895.88 2106.56,3896.77 2105,3897.08 1990,3897.08 1988.44,3896.77 1987.12,3895.88 1161.92,3070.68 1122,3030.77 977.27,3175.5 1034.88,3233.12 1826.99,4025.22 1874.88,4073.12 1874.89,4073.12 1875.34,4073.8 1875.77,4074.44 1875.77,4074.45 1875.93,4075.24 1876.08,4076 1876.08,4076.01 1875.83,4159.75 1876.08,4161 1876.08,4195.92 2137.31,4195.92
+5 on Power Plane (split plane): 1702.12,847.12 1703.44,846.23 1705,845.92 2135.92,845.92 2135.92,629.08 1541.69,629.08 1347.88,822.88 1346.56,823.77 1345,824.08 1229.08,824.08 1229.08,995.92 1345,995.92 1345.01,995.92 1346.56,996.23 1347.88,997.12 1347.89,997.12 1424.57,1073.81 1475.43,1073.81
AVDD18 on Power Plane (split plane): 1672.12,1247.12 1672.78,1246.67 1673.44,1246.23 1675,1245.92 2170.92,1245.92 2170.92,1129.08 1626.69,1129.08 1442.88,1312.88 1441.56,1313.77 1440,1314.08 1229.08,1314.08 1229.08,1420.92 1498.31,1420.92
-12 on Power Plane (split plane): 2175.92,489.08 2031.69,489.08 1982.88,537.88 1981.56,538.77 1980,539.08 1735,539.08 1733.44,538.77 1732.78,538.33 1732.12,537.88 1683.31,489.08 1495,489.08 1493.44,488.77 1492.12,487.88 1423.31,419.08 1244.08,419.08 1244.08,545.92 1350,545.92 1351.56,546.23 1352.88,547.12 1426.69,620.92 2175.92,620.92
no net on Power Plane (split plane): 1985.92,3876 1985.92,3863 1985.92,3861.08 1985.92,3845 1985.92,3782 1985.92,3701.69 1897.12,3612.88 1896.23,3611.56 1895.92,3610 1895.92,3029.08 1150,3029.08 1148.44,3028.77 1147.12,3027.88 1146.23,3026.56 1145.92,3025 1145.92,2651.69 1079.41,2585.18 954.08,2585.18 954.08,2700 953.77,2701.56 952.88,2702.88 821.08,2834.69 821.08,3320.15 842.12,3299.12 1119.12,3022.12 1120.44,3021.23 1122,3020.92 1123.56,3021.23 1124.88,3022.12 1167.68,3064.92 1985.92,3883.15
OVDD18 on Power Plane (split plane): 2070.92,1736.69 1992.12,1657.88 1991.23,1656.56 1990.92,1655 1990.92,1474.08 1879.08,1474.08 1879.08,1723.31 1952.88,1797.12 1953.77,1798.44 1954.08,1800 1954.08,2170.92 2070.92,2170.92
-12 on Power Plane (split plane): 2220.92,4507 2220.92,4466.08 2056,4466.08 2054.44,4465.77 2053.12,4464.88 1831.31,4243.08 1739,4243.08 1737.44,4242.77 1736.12,4241.88 1721.7,4227.47 1721,4227 1529.31,4035.08 1200,4035.08 1198.44,4034.77 1197.12,4033.88 1196.23,4032.56 1195.92,4031 1195.92,3714.69 842.12,3360.88 814.12,3332.88 813.23,3331.56 812.92,3330 812.92,2833 813.23,2831.44 814.12,2830.12 945.92,2698.31 945.92,2585.18 679.08,2585.18 679.08,3345.31 695.88,3362.12 979.88,3646.12 980.33,3646.78 980.77,3647.44 981.08,3649 981.08,3886.31 1061.88,3967.12 1062.77,3968.44 1063.08,3970 1063.08,4609.92 1195.92,4609.92 1195.92,4298 1196.23,4296.44 1197.12,4295.12 1198.44,4294.23 1200,4293.92 1584,4293.92 1585.56,4294.23 1586.88,4295.12 1667.69,4375.92 1796,4375.92 1797.56,4376.23 1798.88,4377.12 1860.88,4439.12 1861.77,4440.44 1862.08,4442 1862.08,4570.31 1904.69,4612.92 2220.92,4612.92
+12 on Power Plane (split plane): 2390.92,4431.69 2326,4366.77 2229.08,4463.69 2229.08,4507 2229.08,4617 2228.77,4618.56 2227.88,4619.88 2226.56,4620.77 2225,4621.08 1903,4621.08 1901.44,4620.77 1900.12,4619.88 1855.12,4574.88 1854.23,4573.56 1853.92,4572 1853.92,4443.69 1794.31,4384.08 1666,4384.08 1664.44,4383.77 1663.12,4382.88 1662.72,4382.28 1662.12,4381.88 1582.31,4302.08 1204.08,4302.08 1204.08,4614 1203.77,4615.56 1202.88,4616.88 1201.56,4617.77 1200,4618.08 1059,4618.08 1057.44,4617.77 1056.12,4616.88 1055.23,4615.56 1054.92,4614 1054.92,3971.69 974.12,3890.88 973.23,3889.56 972.92,3888 972.92,3650.69 690.12,3367.88 672.12,3349.88 671.23,3348.56 670.92,3347 670.92,2585.18 373.69,2585.18 322.08,2636.79 322.08,2903.31 322.08,3171.31 571.88,3421.12 830.88,3680.12 831.77,3681.44 832.08,3683 832.08,3854 832.08,4554 832.08,4726.92 2390.92,4726.92
+5IN on Power Plane (split plane): 313.92,2903.31 313.92,2635.1 314.23,2633.54 315.12,2632.22 369.12,2578.22 370.44,2577.33 372,2577.02 1081.1,2577.02 1082.66,2577.33 1083.99,2578.22 1152.88,2647.12 1153.77,2648.44 1154.08,2650 1154.08,3020.92 2195.92,3020.92 2195.92,2904.08 1400,2904.08 1398.44,2903.77 1397.12,2902.88 1396.23,2901.56 1395.92,2900 1395.92,2329.08 1115,2329.08 1113.44,2328.77 1112.12,2327.88 572.12,1787.88 571.23,1786.56 570.92,1785 570.92,1560 570.92,1555 570.92,1360 571.23,1358.44 572.12,1357.12 1020.92,908.31 1020.92,804.08 871.69,804.08 627.88,1047.88 626.56,1048.77 625,1049.08 224.08,1049.08 224.08,1168.31 323.88,1268.12 334.88,1279.12 335.77,1280.44 336.08,1282 336.08,2182 336.08,2477 335.77,2478.56 334.88,2479.88 111.88,2702.88 110.56,2703.77 109,2704.08 20.1,2704.08 20.1,3168.92 313.92,3168.92
+68 on Power Plane (split plane): 225.92,4876.08 114,4876.08 112.44,4875.77 111.12,4874.88 110.23,4873.56 109.92,4872 109.92,4626 110.23,4624.44 111.12,4623.12 374.92,4359.31 374.92,4260.08 20.1,4260.08 20.1,5479.9 225.92,5479.9
AGND on Power Plane (split plane): 632.92,3493.69 566.12,3426.88 316.31,3177.08 20.1,3177.08 20.1,4251.92 632.92,4251.92
no net on Power Plane (split plane): 219 vertices, not listed, extent 20.1,20.1 3979.9,5479.9
+12 on Power Plane (split plane): 752.91,496.5 770.92,485.69 770.92,477.96 770.92,415 771.23,413.44 772.12,412.12 773.44,411.23 775,410.92 1425,410.92 1426.56,411.23 1427.88,412.12 1496.69,480.92 1685,480.92 1686.56,481.23 1687.88,482.12 1736.69,530.92 1978.31,530.92 2027.12,482.12 2027.78,481.67 2028.44,481.23 2030,480.92 2255,480.92 2256.56,481.23 2257.88,482.12 2258.77,483.44 2259.08,485 2258.77,486.56 2258.56,486.87 2282.61,510.92 2505.92,510.92 2505.92,334.08 1505,334.08 1503.44,333.77 1502.12,332.88 1501.23,331.56 1500.92,330 1500.92,279.08 654.08,279.08 654.08,555.02
+12IN on Power Plane (split plane): 327.92,2475.31 327.92,2182 327.92,1283.69 318.12,1273.88 217.12,1172.88 216.23,1171.56 215.92,1170 215.92,1045 216.23,1043.44 217.12,1042.12 218.44,1041.23 220,1040.92 370.92,1040.92 370.92,944.08 225,944.08 223.44,943.77 222.12,942.88 221.23,941.56 220.92,940 220.92,525 221.23,523.44 222.12,522.12 223.44,521.23 225,520.92 320.92,520.92 320.92,354.08 20.1,354.08 20.1,2695.92 107.31,2695.92
-12IN on Power Plane (split plane): 870.92,572.68 870.92,419.08 779.08,419.08 779.08,477.96 779.08,488 778.98,488.49 778.96,488.99 778.83,489.26 778.77,489.56 778.49,489.98 778.28,490.43 778.05,490.63 777.88,490.88 777.47,491.16 777.1,491.5 757.1,503.5 757.09,503.5 757.08,503.51 377.08,728.51 376.8,728.61 376.56,728.77 376.06,728.87 375.58,729.04 375.29,729.02 375,729.08 229.08,729.08 229.08,840.92 418.88,840.92

## Keep-outs
Keep-Out Layer:
  circle w5: c118.11,3531.39 r62.5
  circle w5: c2834.65,3531.39 r62.5
  circle w5: c2834.65,1799.11 r62.5
  circle w5: c118.11,1799.11 r62.5

## Other copper
Top Layer:
  rectangle net NetC74_1: 1580,2410 1715,2485
  rectangle net NetC74_1: 1500,2480 1785,2560
  rectangle net NetC49_1: 870,1635 1015,1825
  rectangle net -12: 25,3610 575,4100
  rectangle net NetC49_1: 675,1570 900,1825
Bottom Layer:
  rectangle net NetC74_1: 1500,2480 1785,2560
  rectangle net NetC74_1: 1580,2410 1715,2485
  rectangle net NetC49_1: 895,1635 1015,1825
  rectangle net NetC49_1: 675,1655 900,1825
  rectangle net NetC49_1: 740,1570 895,1655
  rectangle net -12: 25,3610 575,4100
Ground Plane (plane layer: these items are gaps in the copper):
  rectangle: 2107.01,1287 2229,1305
  rectangle: 2162.93,435.28 2397.93,575.28
  rectangle: 1590,435 1825,575
  rectangle: 1665,725 1785,870
  rectangle: 2135,730 2255,870
  rectangle: 2085,750 2135,845
  rectangle: 2254.62,749.04 2304.62,844.04
  rectangle: 1619,750 1669,845
  rectangle: 1783.62,749.04 1833.62,844.04
  region: 1827.14,4347.86 1960.31,4481.02 1863.16,4578.16 1730,4445
  region: 1831.12,4356.12 1767.9,4419.33 1725.88,4377.31 1789.1,4314.1
  region: 2408.15,4412.14 2241.98,4578.31 2142.99,4479.31 2309.16,4313.14
  region: 1730,1322 1478,1574 1476,1793.18 1459,1793.18 1459,1567 1722,1304 1813.99,1304 1813.99,1322
  region: 1247,3566.04 1247,4035 1490.23,4035 1681.23,4226 1797,4226 1797,4212 1688,4212 1497,4021 1261,4021 1261,3566.04
  region: 1846.31,4226 1889.15,4183.15 1882,4176 1846,4212 1797,4212 1797,4226
  region: 1876,4091 1826,4091 1797,4062 1805,4054 1830,4077 1876,4077
  region: 629,4209 691,4271 691,5500 707,5500 707,4265 644,4202 644,3534 629,3535
  region: 2474,3387.42 2474,3537.42 2485,3537.42 2485,3387.42
  region: 2475,3387.42 2474,3330 2485,3330 2485,3387.42
  region: 2474,3535 2474,3933 2332,4075 2213,4075 2213,4085 2339,4085 2485,3939 2485,3535
  region: 1459,1793.18 1459,2003.18 1478,2003.18 1478,1793.18
  region: 2450,1793.18 2450,2003.18 2469,2003.18 2469,1793.18
  region: 2218,1302 ccw(c2222.83,1302) 2219.41,1298.59 2230,1288 2469,1527 2469,1786.22 ccw(c2462.04,1786.22) 2466.96,1791.14 2469,1793.18 2450,1793.18 2450,1534
  lines w4: 691,5500 691,4271 629,4209 629,3534 644,3534 644,4202 707,4265 707,5500 ; 1459,1793.18 1459,1591 1459,1567 1489,1537 1722,1304 1793.99,1304 1811.95,1304 ; 1478,1793.18 1478,1594 1478,1574 1508,1544 1730,1322 1787,1322 1807,1322 1813.99,1322 1813.99,1304 ; 1610,4154.77 1681.23,4226 ; 1807.88,4071.88 1807.88,4072.88 ; 1815.88,4063.88 1815.88,4067.12 ; 1852,4206 1846,4212 ; 2221,1305 2164,1305 2114,1305 2107.01,1305 2107.01,1287 2179,1287 2229,1287 ; 2301,4085 2339,4085 2470,3954 2485,3939 2485,3913 ; 2333,4085 2213,4085 2213,4075 2301,4075 2332,4075 2450.12,3956.88 2455,3952 ; 2411,1495 2450,1534 2450,1577 ; 2439,1523 2217,1301 2230,1288 2469,1527 2469,1569 ; 2450,1560 2450,1580 2450,1793.18 ; 2452,3955 2474,3933 2474,3913 2474,3794.09 ; 2469,1553 2469,1577 2469,1793.18 ; 2474,3793.35 2474,3537.42 2474,3387.42 ; 2485,3537.42 2485,3387.42 ; 2485,3538.42 2485,3794.35 ; 2485,3794.09 2485,3913 ; 2485,3919 2485,3913 ; 1681.23,4226 1490.23,4035 1247,4035 1247,3566.04 1255.08,3566.04 1261,3566.04 1261,4021 1497,4021 1688,4212 1797,4212 1797,4226 1681.23,4226 ; 1821,4086 1826,4091 1876,4091 1876,4077 1837,4077 1830,4077 ; 1821,4086 1830,4077 ; 1821,4086 1797,4062 1805,4054 1828,4077 1830,4077 ; 1846,4212 1882,4176 1889.15,4183.15 1846.31,4226 1835,4226 1830,4226 1830,4212 1846,4212 ; 2474,3387.42 2485,3387.42 ; 2474,3387.42 2479.26,3387.42 2485,3387.42 ; 2474,3387.42 2474,3330 2485,3330 2485,3387.42
  lines w8: 1438,0 1438,329 1438,362 1524.86,362 ccw(c1524.86,376.83) 1535.34,366.34 ccw(c1521.69,380) 1541,380 1541,417 1558,434 1872,434 1872,0 ; 1788.25,4504.25 1970,4686 2194,4686 2194,5500 ; 1798,5500 1798,4667 1798,4659 1581,4442 1698,4325 1732,4291 1764,4291 1788.25,4315.25 1730,4373.51 1730,4446 1814,4530 ; 2188,0 2188,434 2575,434 ; 2356,4292 2317,4331 ; 2439,434 2622,434 2622,0 ; 2548,5500 2548,4667 2548,4488 2423,4363 cw(c2399,4384.5) 2377.5,4360.5 2362,4376 2321,4335 2317,4331 ; 2550,4292 2656,4398 ; 2940,5500 2940,4682 2540,4282 2366,4282 2317,4331 ; 675,1570 900,1570 900,1635 1015,1635 1015,1825 675,1825 675,1570 ; 1500,2480 1500,2560 1785,2560 1785,2480 1715,2480 1715,2410 1580,2410 1580,2480 1500,2480
  lines w20: 1375,3475 1645,3475 ; 1550,3475 1720,3475 1720,3977 1813,4070
  lines w33: 1745,4380 1745,4445
Power Plane (plane layer: these items are gaps in the copper):
  lines w8: 0,350 325,350 325,525 225,525 225,940 375,940 375,1045 ; 0,2700 73,2700 ; 0,4256 379,4256 ; 2,3173 318,3173 ; 58,2700 109,2700 332,2477 332,2182 332,1282 321,1271 ; 225,725 375,725 755,500 775,488 775,477.96 775,415 875,415 ; 225,845 375,845 420,845 875,575 875,415 ; 230,5500 230,4872 114,4872 114,4626 379,4361 379,4256 ; 326.12,1276.12 220,1170 220,1045 510,1045 ; 470,1045 625,1045 870,800 1025,800 1025,910 575,1360 575,1560 ; 575,1555 575,1785 1115,2325 1400,2325 1400,2900 2200,2900 2200,3025 ; 637,3492 637,4256 379,4256 ; 650,562.17 650,275 1505,275 1505,330 2510,330 2510,515 2280.92,515 2255,489.08 ; 675,2581.1 675,3347 693,3365 977,3649 977,3888 1059,3970 1059,4614 1200,4614 1200,4298 1584,4298 1665,4379 ; 845,3358 1200,3713 1200,4031 1476,4031 ; 852,3365 817,3330 ; 950,2581.1 950,2700 817,2833 817,3330 ; 972,3176 1032,3236 ; 1030,3234 1824.1,4028.1 1872,4076 1871.7,4177.29 ; 1399,4031 1529,4031 1531,4031 1723.88,4224.12 ; 1540,625 1345,820 1225,820 1225,1000 1345,1000 1422.88,1077.88 1477.12,1077.88 1705,850 1775,850 ; 1666,4380 1796,4380 1858,4442 1858,4572 1903,4617 2225,4617 2225,4507 2225,4462 ; 1709.08,850 2140,850 2140,625 ; 1716,4216 1739,4239 1833,4239 ; 1872,4161 1872,4200 ; 1900,3025 1900,3610 1990,3700 1990,3861.08 ; 1911.19,4316 2233,4316 2595,3954 ; 1990,3782 1990,3863 ; 1990,3845 1990,3876 1990,3893 ; 2104.69,3857.36 2105,3585 2000,3480 2000,3152.8 2495,3152.8 ; 2105,3784 2105,3863 ; 2105,3848 2105,3876 2105,3893 1990,3893 ; 2105,3862 2283,3862 2283,3893 2283,4056 2271,4068 ; 2180,485 2180,625 1425,625 1350,550 1240,550 1240,415 ; 2203,4136 2139,4200 ; 2255,485 2030,485 1980,535 1735,535 1685,485 1495,485 1425,415 1240,415 ; 318,3173 318,2903.31 318,2635.1 372,2581.1 449,2581.1 835,2581.1 1081.1,2581.1 1150,2650 1150,3025 2200,3025 ; 318,3173 569,3424 828,3683 828,3854 828,4554 828,4731 1495,4731 2395,4731 2395,4430 2326,4361 2225,4462 ; 817,3330 845,3302 1122,3025 1164.8,3067.8 1990,3893 ; 875,415 1240,415 ; 1833,4239 1872,4200 ; 1833,4239 2056,4462 2166,4462 2225,4462 ; 1872,4200 2139,4200 ; 2139,4200 2495,3844 2495,3773 2495,3737.8 2495,3152.8 ; 2200,3025 2723,3025 2723,4277 2595,4277 2595,4216 2595,3954 ; 2495,3152.8 2595,3152.8 2595,3607.8 2595,3954 ; 1225,1310 1225,1425 1500,1425 1675,1250 2175,1250 2175,1125 1625,1125 1440,1310 1225,1310 ; 1875,1470 1875,1725 1950,1800 1950,2175 2075,2175 2075,1735 1995,1655 1995,1470 1875,1470

## Silkscreen, mask and mechanical layers (free items; w line width, h text height)
Top Overlay:
  rectangle: 200,24 950,175
  lines w8: 1175,4205 1205,4175 1225,4175 ; 1485,955 1505,935 ; 1855,570 1895,570 1915,550 ; 1875,1055 1890,1040 ; 2025,895 2040,910 ; 2025,1025 2040,1040 ; 2055,550 2065,560 2070,560 ; 2110,550 2120,560 2120,585 ; 2150,610 2150,600 2175,575
  lines w20: 1061,4070 1061,4070 ; 1080.61,3682.16 1080.61,3682.16 ; 1926.61,4463.16 1926.61,4463.16
  text "+68" at 187,5007 h40
  text "GND" at 197,4726 h40
  text "WR1_OUT" at 2054,4663 h40
  text "A0_OUT" at 2035,4599 h40
  text "A1_OUT" at 1752.12,4572.12 h40
  text "WR2_OUT" at 2552,4294 h40
  text "U10-OUT" at 1180,4120 h38
  text "BANK 0/1" at 886,3459 h40
  text "CVDD18" at 892,3314 h40
  text "DVDD25" at 315,3215 h40
  text "DVDD18" at 1067,3146 h40
  text "AVDD33" at 2580,3136.2 h40
  text "DVDD33" at 1977.8,3045 h40
  text "+12" at 407,2611.1 h40
  text "-12" at 912,2611.1 h40
  text "OVDD" at 1846,2099 h40
  text "BANK 1" at 975,1861 h40
  text "GRN" at 2940,1850 h40
  text "GND" at 2940,1750 h40
  text "RED" at 2940,1650 h40
  text "AV18" at 1020,1530 h40
  text "AVDD18" at 1260,1320 h40
  text "TMS" at 890,1210 h40
  text "TCK" at 890,1135 h40
  text "+5" at 450,1080 h40
  text "TDO" at 890,1055 h40
  text "+12" at 450,980 h40
  text "TDI" at 890,975 h40
  text "+5" at 1301,922 h40
  text "GND" at 450,880 h40
  text "-12" at 450,780 h40
  text "WR2_IN" at 2190,575 h40 r270
  text "WR1_IN" at 1907,539 h40 r270
  text "A1_IN" at 2034,536 h40 r270
  text "A0_IN" at 2085,536 h40 r270
  text "+12" at 642,475 h40
  text "-12" at 1151,442 h40
  text "OK6010_DB.PcbDoc" at 209,338 h40
  text "david.leibrandt@nist.gov" at 206,273 h40
  text "7/29/2016" at 206,206 h40